# EAGLE board RGB_Fan_Controller_Rev_B (EAGLE 5.06)
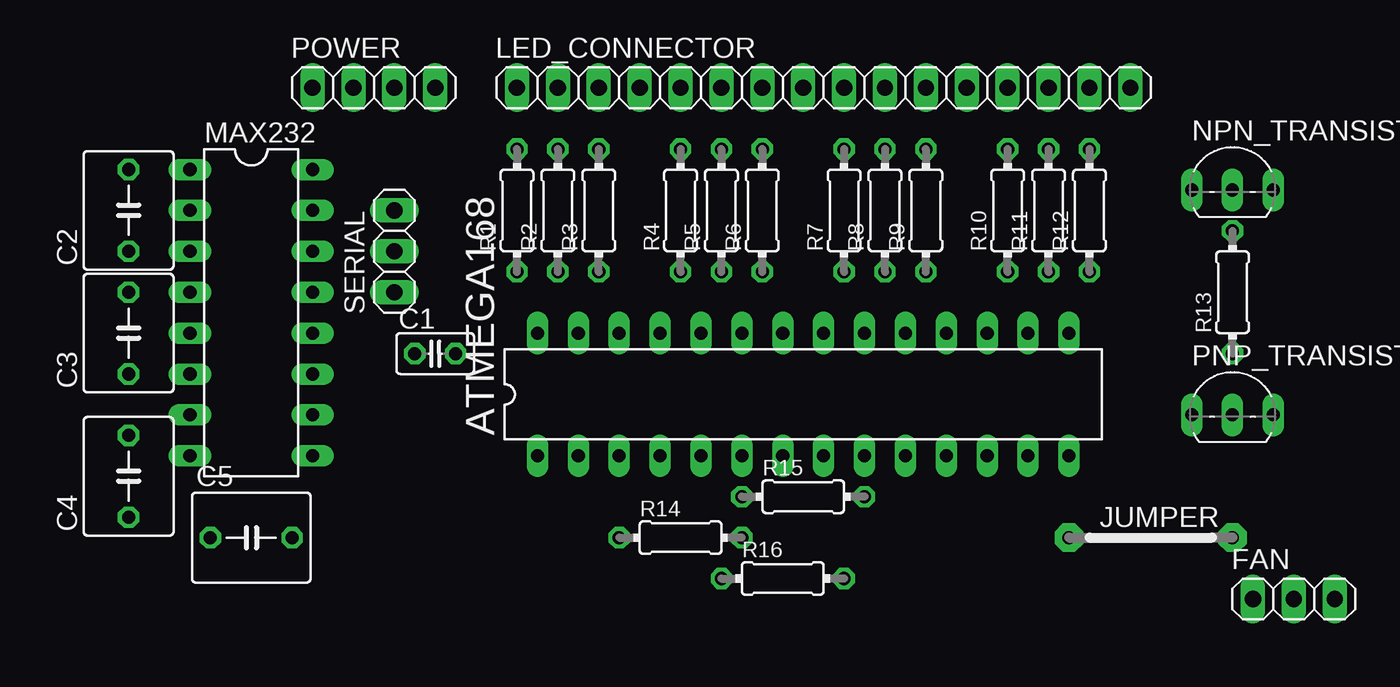
[diagram p0: board, top side]
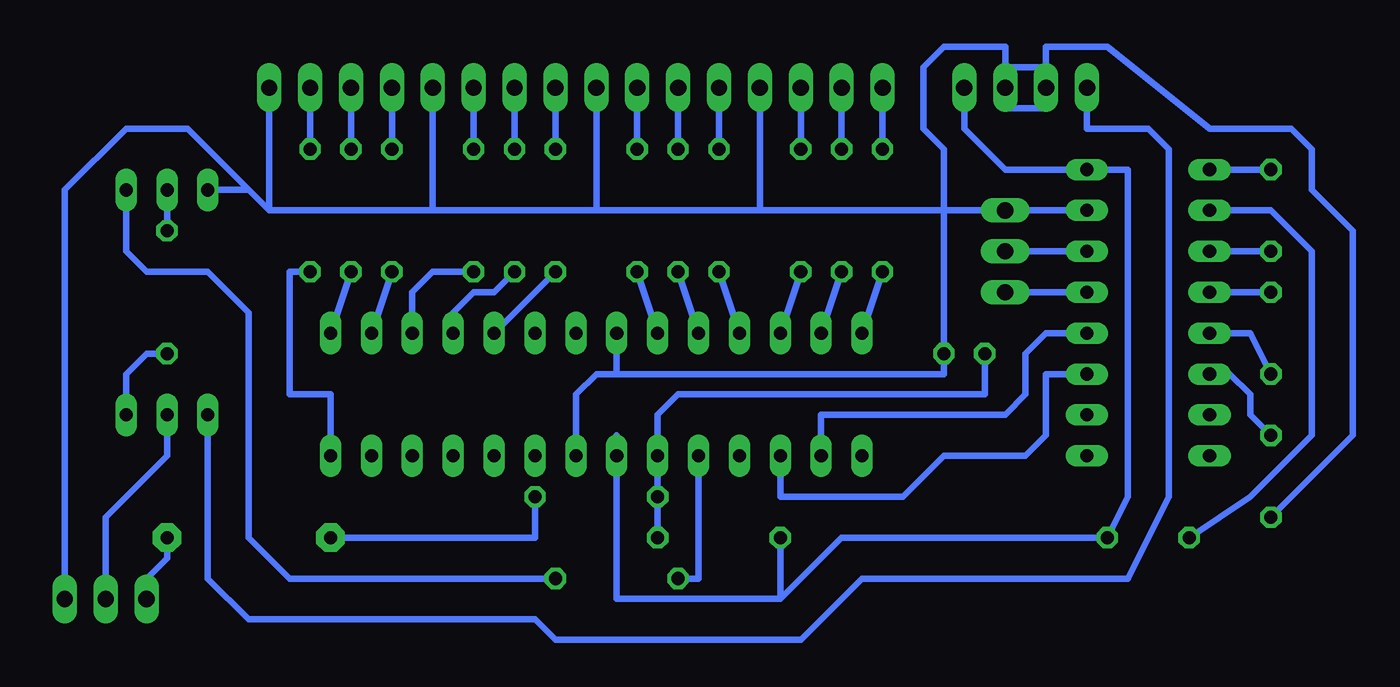
[diagram p1: board, bottom side, seen from below]

No outline drawn. Coordinates in mm, seen from the top.
Copper layers (1*16): Top 0.035mm / dielectric 1.5mm / Bottom 0.035mm
Design rules "default": minimum track width 10mil, minimum drill 24mil, track to track 8mil, track to pad 8mil, pad to pad 8mil, via to via 8mil, smd to smd 8mil, copper to edge 40mil, drill to drill 8mil, minimum pad ring 10mil, minimum via ring 8mil, stop-mask expansion 4mil, vias tented up to drill 0mil, thermal gap 10mil

## Footprints (pad centres in the part's own frame; a part is rotated, then mirrored left to right if it is on the bottom)
DIL28-3 = drill 0.813 long: 1 -16.51,-3.81; 2 -13.97,-3.81; 3 -11.43,-3.81; 4 -8.89,-3.81; 5 -6.35,-3.81; 6 -3.81,-3.81; 7 -1.27,-3.81; 8 1.27,-3.81; 9 3.81,-3.81; 10 6.35,-3.81; 11 8.89,-3.81; 12 11.43,-3.81; 13 13.97,-3.81; 14 16.51,-3.81; 15 16.51,3.81; 16 13.97,3.81; 17 11.43,3.81; 18 8.89,3.81; 19 6.35,3.81; 20 3.81,3.81; 21 1.27,3.81; 22 -1.27,3.81; 23 -3.81,3.81; 24 -6.35,3.81; 25 -8.89,3.81; 26 -11.43,3.81; 27 -13.97,3.81; 28 -16.51,3.81
C025-025X050 = drill 0.813 octagon: 1 -1.27,0; 2 1.27,0
C050-055X075 = drill 0.813 octagon: 1 -2.54,0; 2 2.54,0
1X03 = drill 1.016 long: 1 -2.54,0; 2 0,0; 3 2.54,0
10E = drill 0.813 pad 1.778 octagon: 1 -5.08,0; 2 5.08,0
1X16 = drill 1.016 long: 1 -19.05,0; 2 -16.51,0; 3 -13.97,0; 4 -11.43,0; 5 -8.89,0; 6 -6.35,0; 7 -3.81,0; 8 -1.27,0; 9 1.27,0; 10 3.81,0; 11 6.35,0; 12 8.89,0; 13 11.43,0; 14 13.97,0; 15 16.51,0; 16 19.05,0
DIL16 = drill 0.813 long: 1 -8.89,-3.81; 2 -6.35,-3.81; 3 -3.81,-3.81; 4 -1.27,-3.81; 5 1.27,-3.81; 6 3.81,-3.81; 7 6.35,-3.81; 8 8.89,-3.81; 9 8.89,3.81; 10 6.35,3.81; 11 3.81,3.81; 12 1.27,3.81; 13 -1.27,3.81; 14 -3.81,3.81; 15 -6.35,3.81; 16 -8.89,3.81
TO92-BCE = drill 0.813 long: B -2.54,0; C 0,0; E 2.54,0
1X04 = drill 1.016 long: 1 -3.81,0; 2 -1.27,0; 3 1.27,0; 4 3.81,0
0204/7 = drill 0.813 octagon: 1 -3.81,0; 2 3.81,0

## Placement (x,y rotation side)
ATMEGA168  [DIL28-3]  49.53,13.97 0 top
C1  [C025-025X050]  26.67,16.51 0 top
C2  [C050-055X075]  7.62,25.4 90 top
C3  [C050-055X075]  7.62,17.78 90 top
C4  [C050-055X075]  7.62,8.89 90 top
C5  [C050-055X075]  15.24,5.08 0 top
FAN  [1X03]  80.01,1.27 0 top
JUMPER  [10E]  71.12,5.08 0 top
LED_CONNECTOR  [1X16]  50.8,33.02 0 top
MAX232  [DIL16]  15.24,19.05 270 top
NPN_TRANSISTOR  [TO92-BCE]  76.2,26.67 0 top
PNP_TRANSISTOR  [TO92-BCE]  76.2,12.7 0 top
POWER  [1X04]  22.86,33.02 0 top
R1  [0204/7]  31.75,25.4 90 top
R2  [0204/7]  34.29,25.4 90 top
R3  [0204/7]  36.83,25.4 90 top
R4  [0204/7]  41.91,25.4 90 top
R5  [0204/7]  44.45,25.4 90 top
R6  [0204/7]  46.99,25.4 90 top
R7  [0204/7]  52.07,25.4 90 top
R8  [0204/7]  54.61,25.4 90 top
R9  [0204/7]  57.15,25.4 90 top
R10  [0204/7]  62.23,25.4 90 top
R11  [0204/7]  64.77,25.4 90 top
R12  [0204/7]  67.31,25.4 90 top
R13  [0204/7]  76.2,20.32 90 top
R14  [0204/7]  41.91,5.08 0 top
R15  [0204/7]  49.53,7.62 0 top
R16  [0204/7]  48.26,2.54 0 top
SERIAL  [1X03]  24.13,22.86 90 top

## Library data of the parts
ATMEGA168 = atmel
C1-C5 R1-R16 = resistor
FAN LED_CONNECTOR POWER SERIAL = pinhead
JUMPER = jumper
MAX232 = maxim
NPN_TRANSISTOR PNP_TRANSISTOR = transistor

## Nets
POWER: ATMEGA168.8 ATMEGA168.22 C4.1 FAN.3 NPN_TRANSISTOR.B POWER.2
S$1: NPN_TRANSISTOR.E R16.2
S$3: ATMEGA168.28 R1.1
S$4: ATMEGA168.27 R2.1
S$5: ATMEGA168.26 R3.1
S$6: ATMEGA168.25 R4.1
S$7: ATMEGA168.24 R5.1
S$8: ATMEGA168.23 R6.1
S$9: ATMEGA168.17 R9.1
S$10: C2.2 MAX232.1
S$11: ATMEGA168.19 R7.1
S$12: ATMEGA168.16 R10.1
S$13: ATMEGA168.15 R11.1
S$14: ATMEGA168.14 R12.1
S$15: R3.2
S$16: R2.2
S$17: R1.2
S$18: R4.2
S$19: R5.2
S$20: R6.2
S$21: R7.2
S$22: R8.2
S$23: R9.2
S$24: R10.2
S$25: R11.2
S$26: R12.2
S$27: ATMEGA168.18 R8.1
S$29: ATMEGA168.2 MAX232.12
S$30: JUMPER.1 R15.2
S$31: ATMEGA168.3 MAX232.11
S$32: NPN_TRANSISTOR.C R13.2
S$33: PNP_TRANSISTOR.E R13.1
S$34: FAN.2 PNP_TRANSISTOR.C
S$35: PNP_TRANSISTOR.B POWER.1
S$36: ATMEGA168.5 R16.1
S$37: R14.2
S$38: FAN.1 JUMPER.2
S$39: POWER.4 R14.1
S$41: C2.1 MAX232.3
S$42: C3.2 MAX232.4
S$43: C3.1 MAX232.5
S$44: C4.2 MAX232.6
S$45: C5.1 MAX232.2

## Tracks (layer width: path | path; a pad name or v marks a point on that pad's centre or on a via)
POWER
  Bottom 0.406: FAN.3 82.55,26.67 78.74,30.48 74.93,30.48 71.12,26.67 | 21.59,34.29 21.59,35.56 17.78,35.56 11.43,30.48 6.35,30.48 5.08,29.21 5.08,26.67 2.54,24.13 2.54,11.43 C4.1 | 21.59,34.29 POWER.2 21.59,31.75 24.13,31.75 24.13,34.29 | 21.59,34.29 24.13,34.29 | 24.13,34.29 24.13,35.56 27.94,35.56 29.21,34.29 29.21,30.48 27.94,29.21 27.94,25.4 | 71.12,26.67 NPN_TRANSISTOR.B | 69.85,25.4 69.85,34.29 | 69.85,25.4 71.12,26.67 | 59.69,25.4 69.85,25.4 | 59.69,25.4 59.69,34.29 | ATMEGA168.8 50.8,13.97 49.53,15.24 48.26,15.24 | 48.26,15.24 ATMEGA168.22 | 49.53,25.4 59.69,25.4 | 49.53,25.4 49.53,34.29 | 39.37,25.4 49.53,25.4 | 39.37,25.4 39.37,34.29 | 48.26,15.24 27.94,15.24 27.94,25.4 | 27.94,25.4 39.37,25.4 | 27.94,25.4 19.05,25.4
S$1
  Bottom 0.406: R16.2 68.58,2.54 71.12,5.08 71.12,19.05 73.66,21.59 77.47,21.59 78.74,22.86 NPN_TRANSISTOR.E
S$2
  Bottom 0.406: 25.4,22.86 19.05,22.86
S$3
  Bottom 0.406: ATMEGA168.28 R1.1
S$4
  Bottom 0.406: ATMEGA168.27 R2.1
S$5
  Bottom 0.406: ATMEGA168.26 R3.1
S$6
  Bottom 0.406: ATMEGA168.25 R4.1
S$7
  Bottom 0.406: ATMEGA168.24 R5.1
S$8
  Bottom 0.406: ATMEGA168.23 R6.1
S$9
  Bottom 0.406: ATMEGA168.17 60.96,20.32 59.69,21.59 R9.1
S$10
  Bottom 0.406: MAX232.1 C2.2
S$11
  Bottom 0.406: ATMEGA168.19 R7.1
S$12
  Bottom 0.406: ATMEGA168.16 R10.1
S$13
  Bottom 0.406: ATMEGA168.15 R11.1
S$14
  Bottom 0.406: ATMEGA168.14 66.04,13.97 68.58,13.97 68.58,21.59 R12.1
S$15
  Bottom 0.406: R3.2 36.83,34.29
S$16
  Bottom 0.406: R2.2 34.29,34.29
S$17
  Bottom 0.406: R1.2 31.75,34.29
S$18
  Bottom 0.406: R4.2 41.91,34.29
S$19
  Bottom 0.406: R5.2 44.45,34.29
S$20
  Bottom 0.406: R6.2 46.99,34.29
S$21
  Bottom 0.406: R7.2 52.07,34.29
S$22
  Bottom 0.406: R8.2 54.61,34.29
S$23
  Bottom 0.406: R9.2 57.15,34.29
S$24
  Bottom 0.406: R10.2 62.23,34.29
S$25
  Bottom 0.406: R11.2 64.77,34.29
S$26
  Bottom 0.406: R12.2 67.31,34.29
S$27
  Bottom 0.406: R8.1 55.88,20.32 57.15,20.32 58.42,19.05 ATMEGA168.18
S$28
  Bottom 0.406: 25.4,20.32 19.05,20.32
S$29
  Bottom 0.406: ATMEGA168.2 35.56,12.7 24.13,12.7 22.86,13.97 22.86,16.51 21.59,17.78 MAX232.12
S$30
  Bottom 0.406: R15.2 53.34,5.08 JUMPER.1
S$31
  Bottom 0.406: MAX232.11 21.59,15.24 21.59,11.43 22.86,10.16 27.94,10.16 30.48,7.62 38.1,7.62 ATMEGA168.3
S$32
  Bottom 0.406: R13.2 NPN_TRANSISTOR.C
S$33
  Bottom 0.406: R13.1 77.47,16.51 78.74,15.24 PNP_TRANSISTOR.E
S$34
  Bottom 0.406: PNP_TRANSISTOR.C 76.2,10.16 80.01,6.35 FAN.2
S$35
  Bottom 0.406: PNP_TRANSISTOR.B 73.66,2.54 71.12,0 53.34,0 52.07,-1.27 36.83,-1.27 33.02,2.54 16.51,2.54 13.97,7.62 13.97,29.21 15.24,30.48 19.05,30.48 POWER.1
S$36
  Bottom 0.406: ATMEGA168.5 43.18,2.54 R16.1
S$37
  Bottom 0.406: R14.2 45.72,12.7 44.45,13.97 25.4,13.97 25.4,16.51
S$38
  Bottom 0.406: JUMPER.2 76.2,3.81 77.47,2.54 FAN.1
S$39
  Bottom 0.406: 48.26,11.43 48.26,1.27 38.1,1.27 | 38.1,1.27 R14.1 | 38.1,1.27 34.29,5.08 17.78,5.08 16.51,7.62 16.51,27.94 24.13,27.94 26.67,30.48 POWER.4
S$41
  Bottom 0.406: MAX232.3 C2.1
S$42
  Bottom 0.406: MAX232.4 C3.2
S$43
  Bottom 0.406: MAX232.5 8.89,17.78 C3.1
S$44
  Bottom 0.406: MAX232.6 10.16,15.24 8.89,13.97 8.89,12.7 C4.2
S$45
  Bottom 0.406: MAX232.2 7.62,25.4 5.08,22.86 5.08,11.43 8.89,7.62 C5.1